# Altium PCB AudioDSP-2.0.PcbDoc (part 1 of 2)
Units mil, origin at the board's own origin, x right, y up, seen from the top; angles counter-clockwise.
Board outline 3935 x 3935 mil, 4 copper layers (Top Layer, MLT, MLB, Bottom Layer), stack 59.617 mil thick; 223 components, 140 nets, 777 pads, 366 vias.
Unrouted connection lines stored in the file: 450.
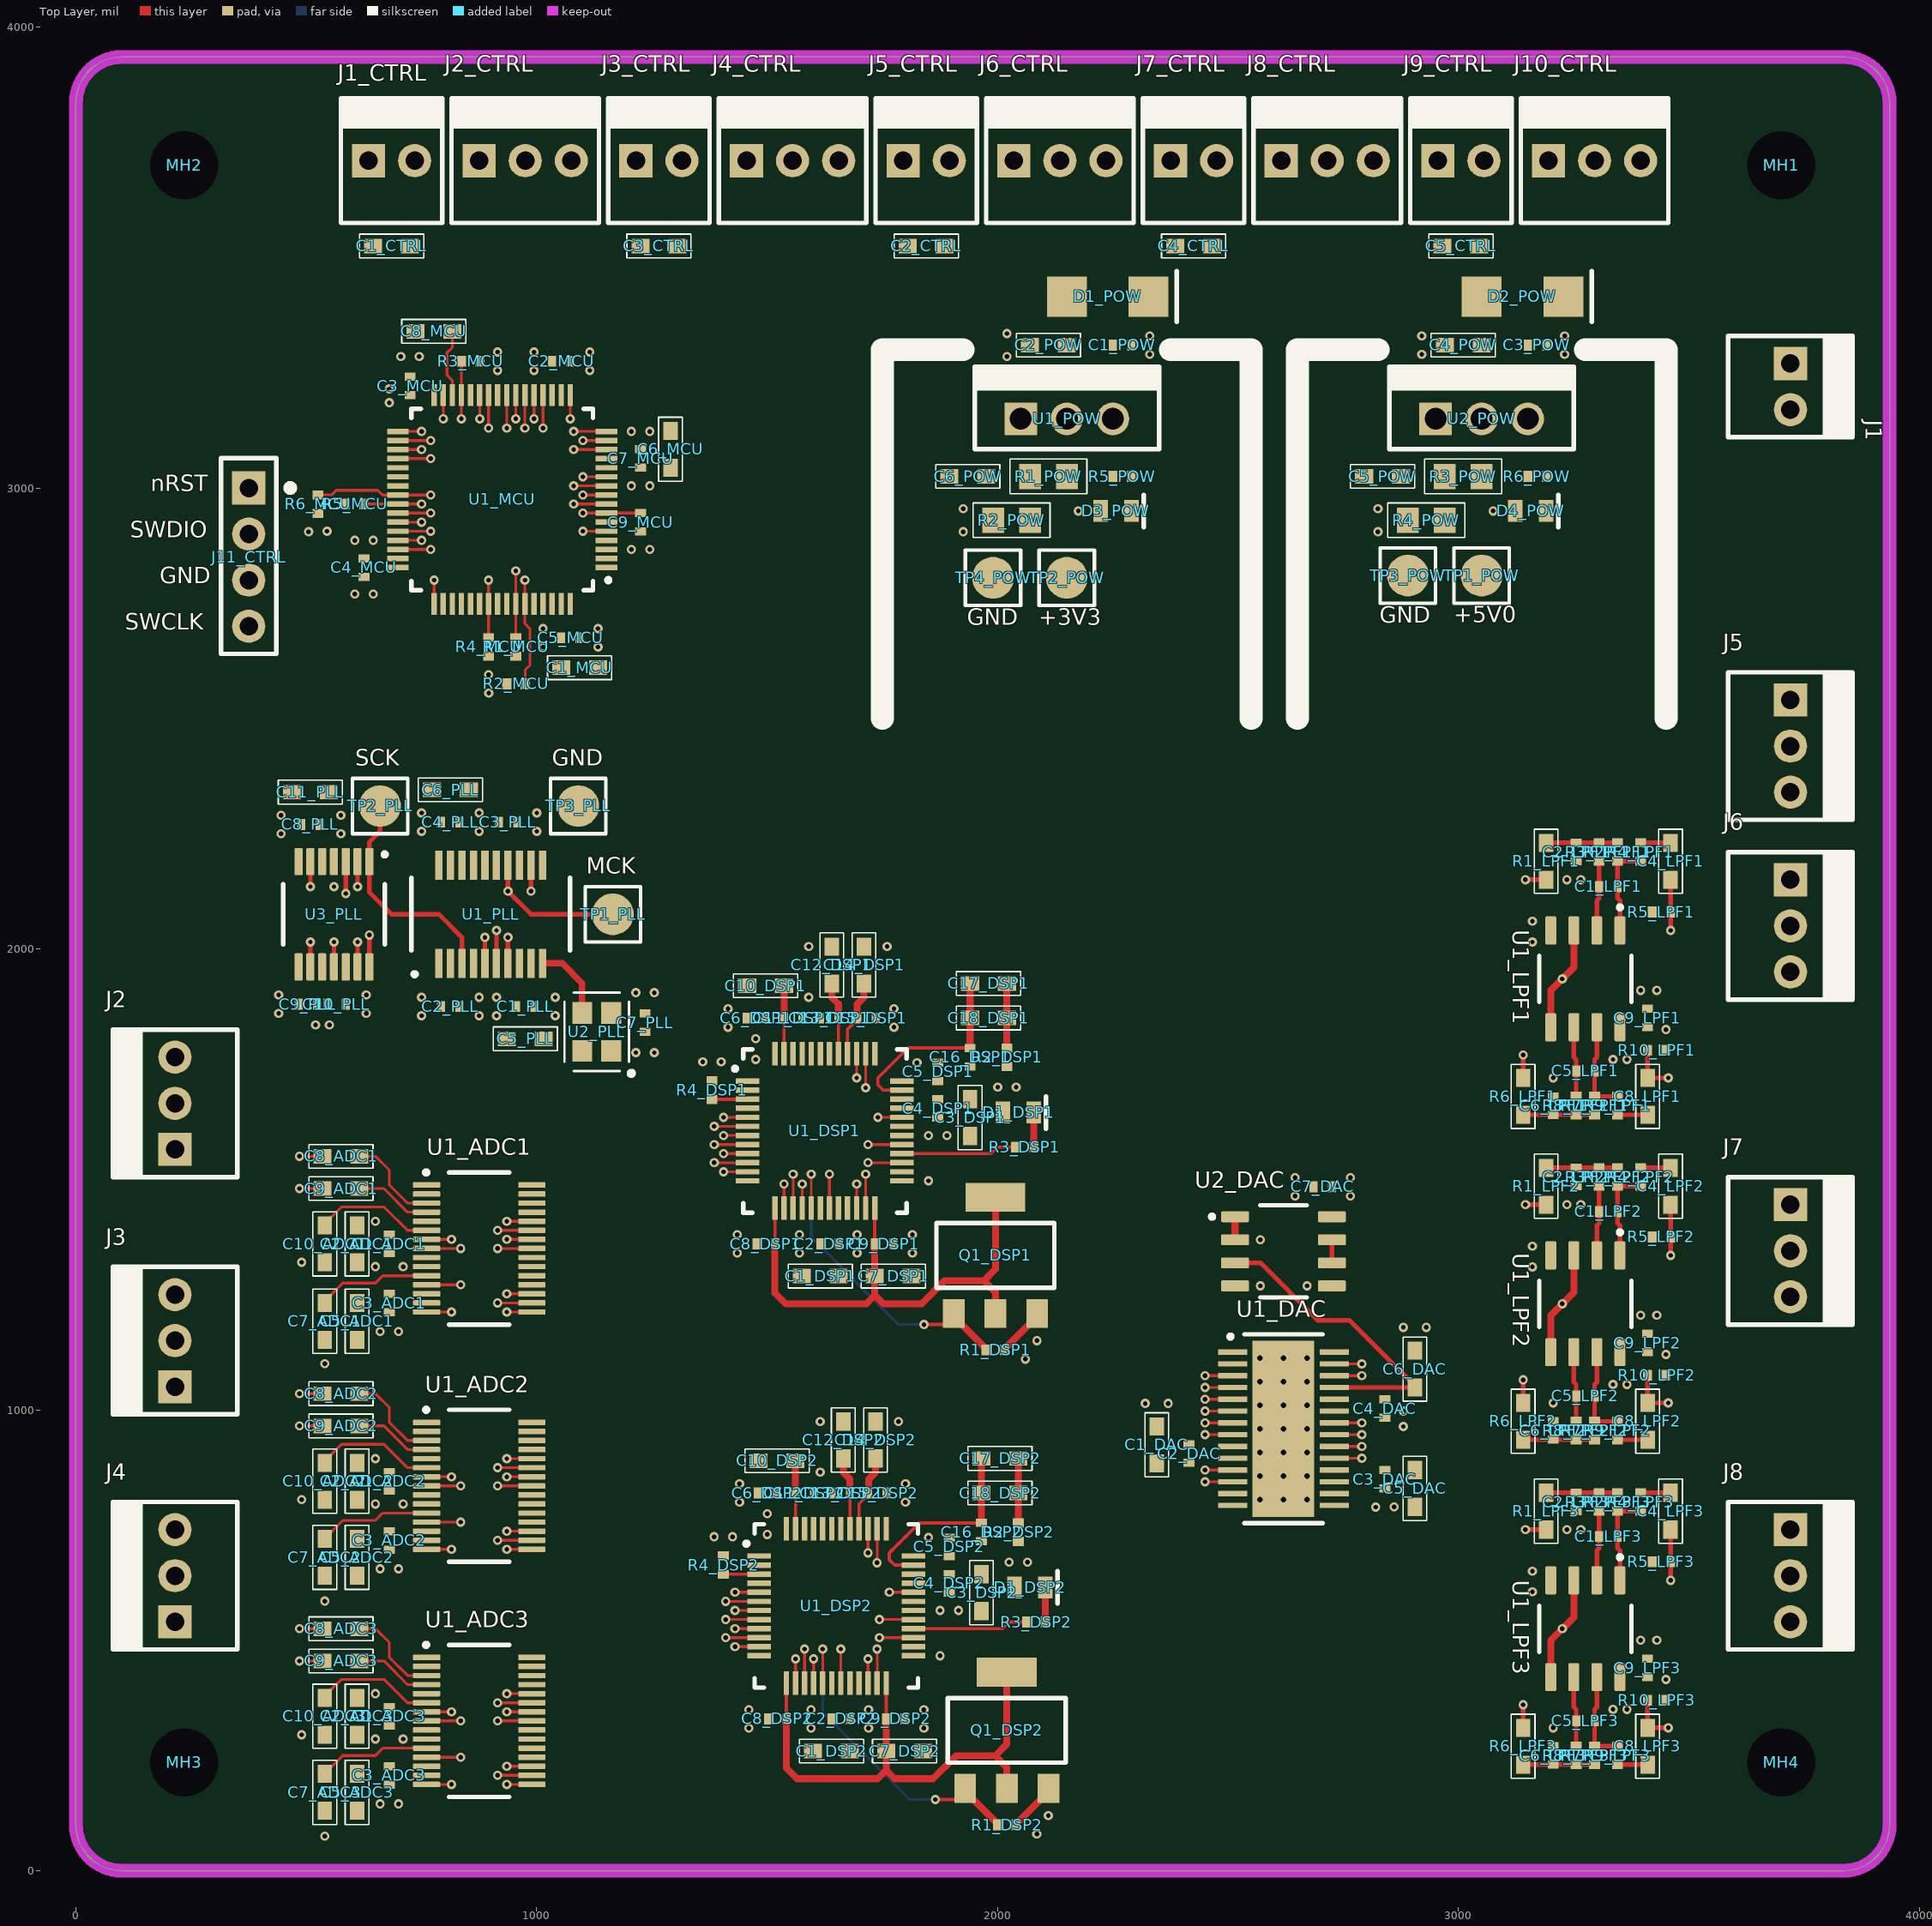
[diagram p0: Top Layer view]
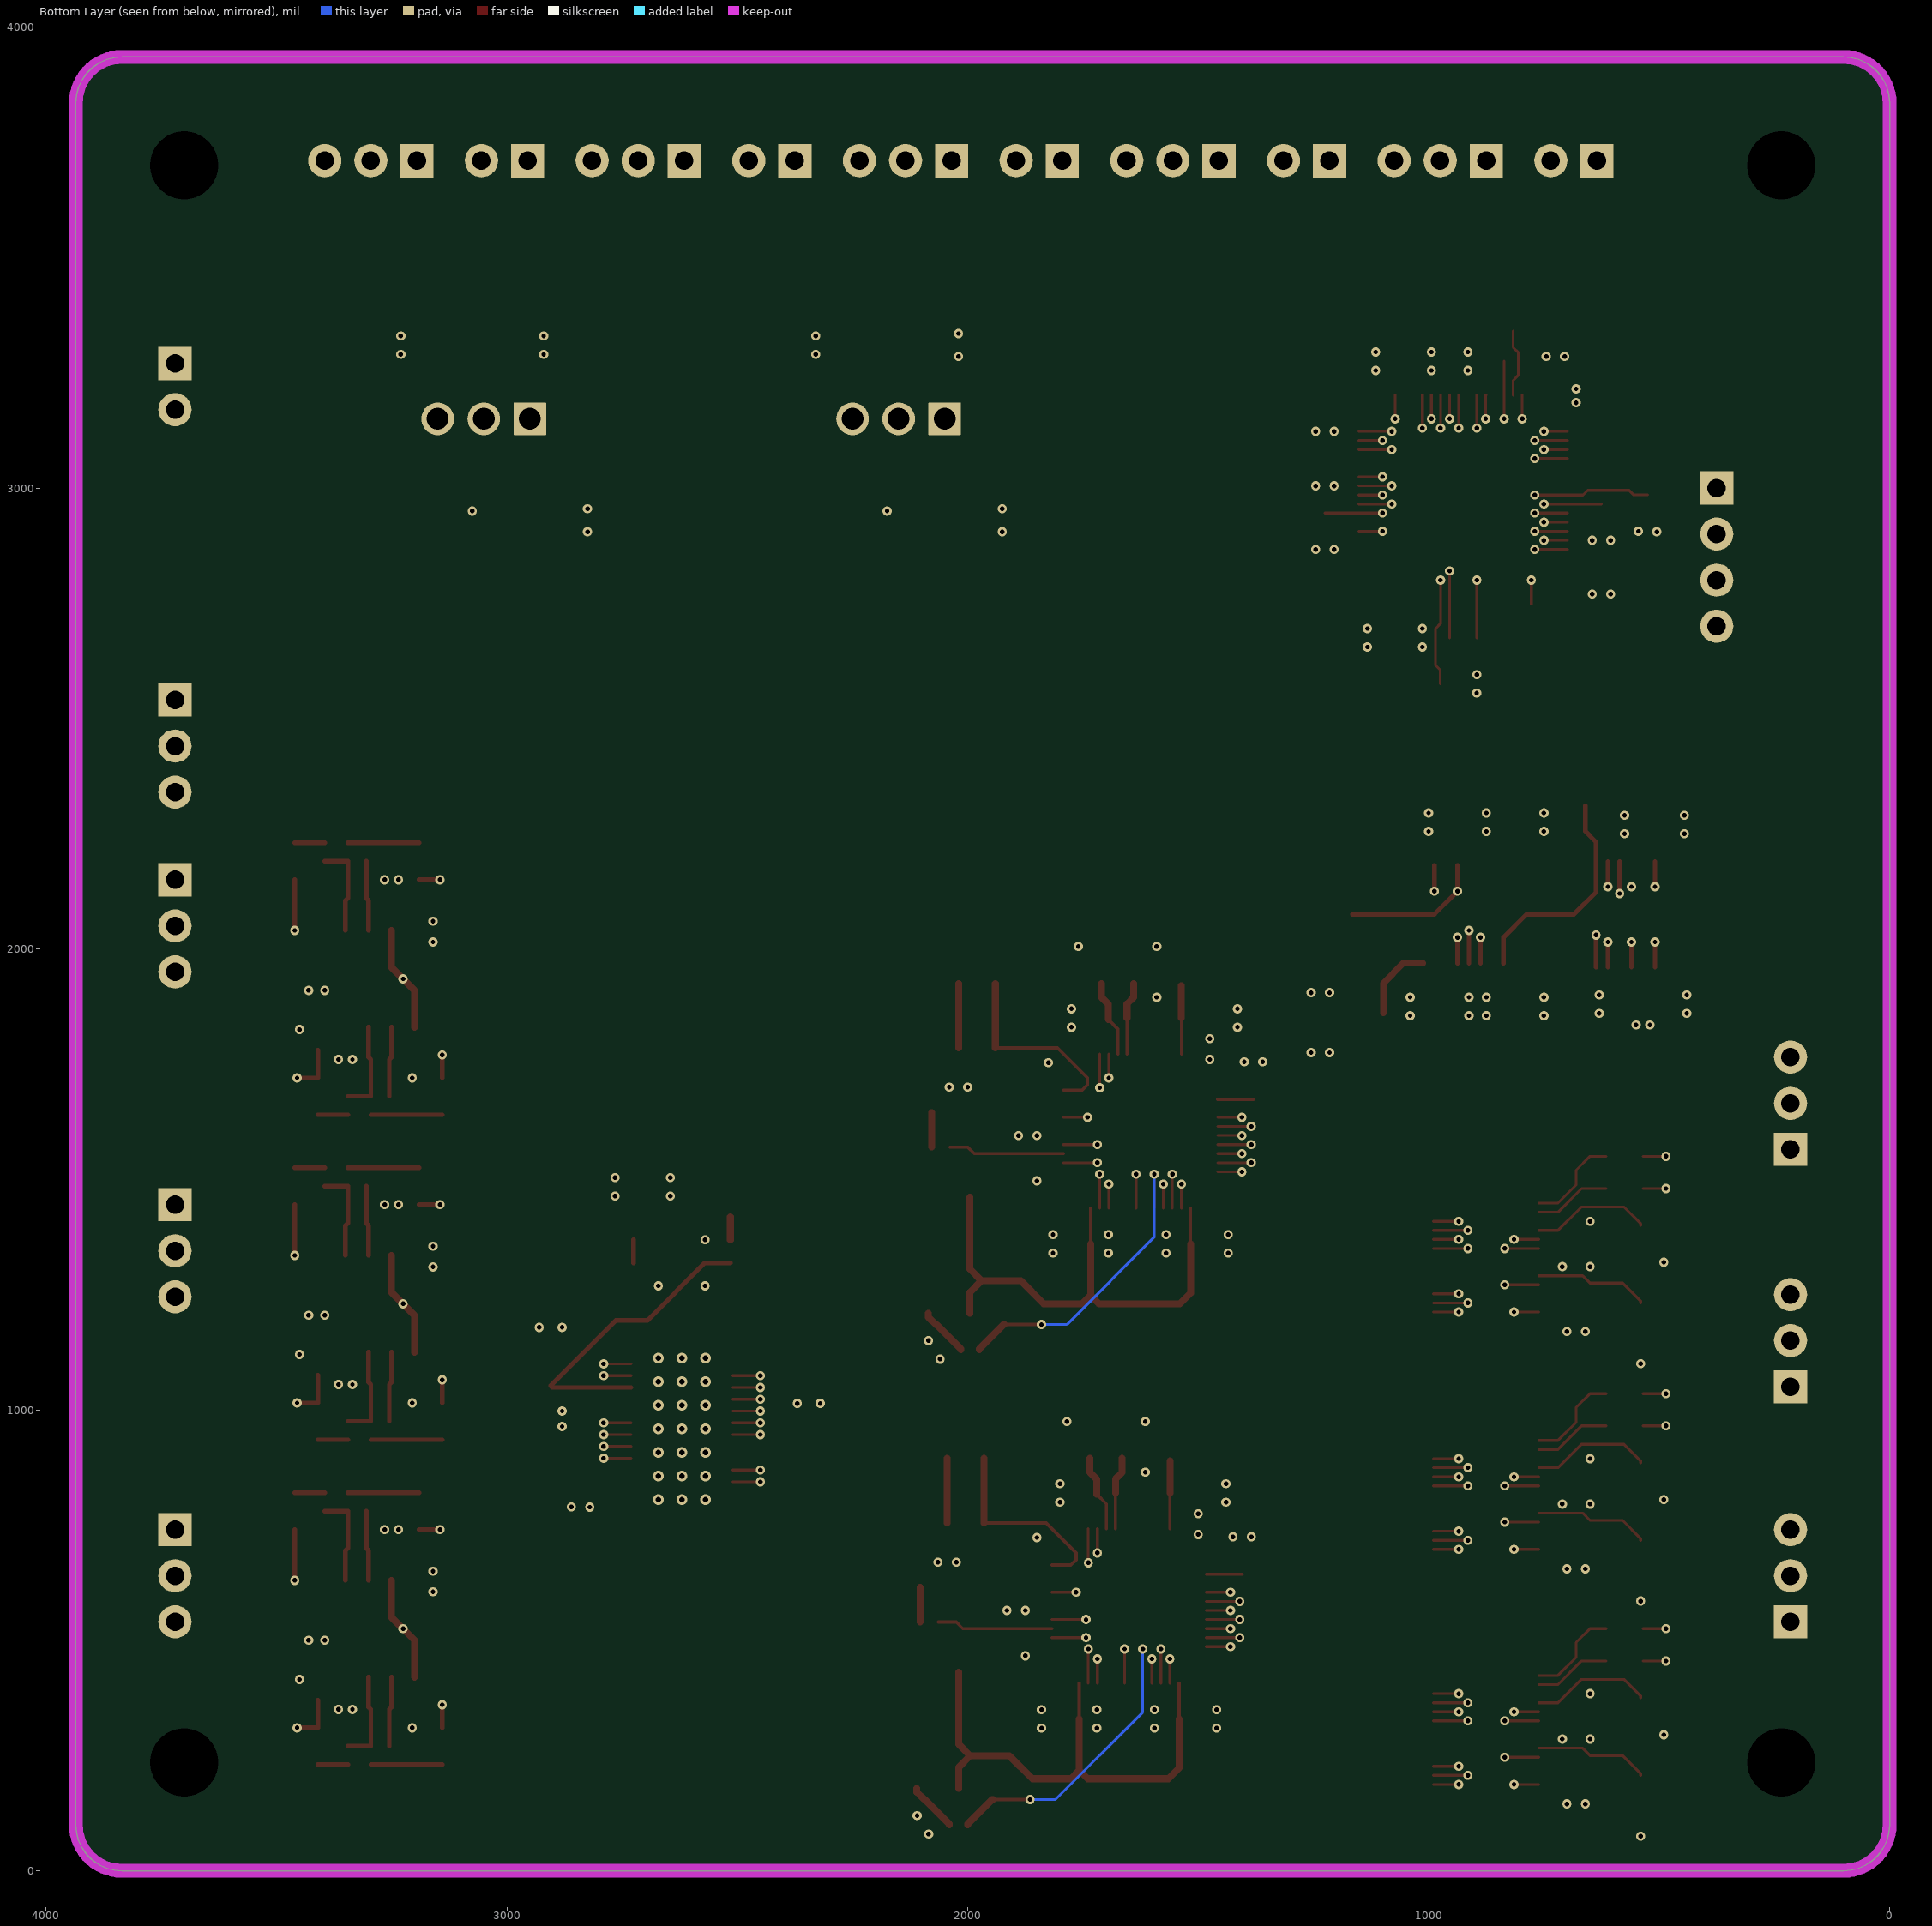
[diagram p1: Bottom Layer view, seen from below]
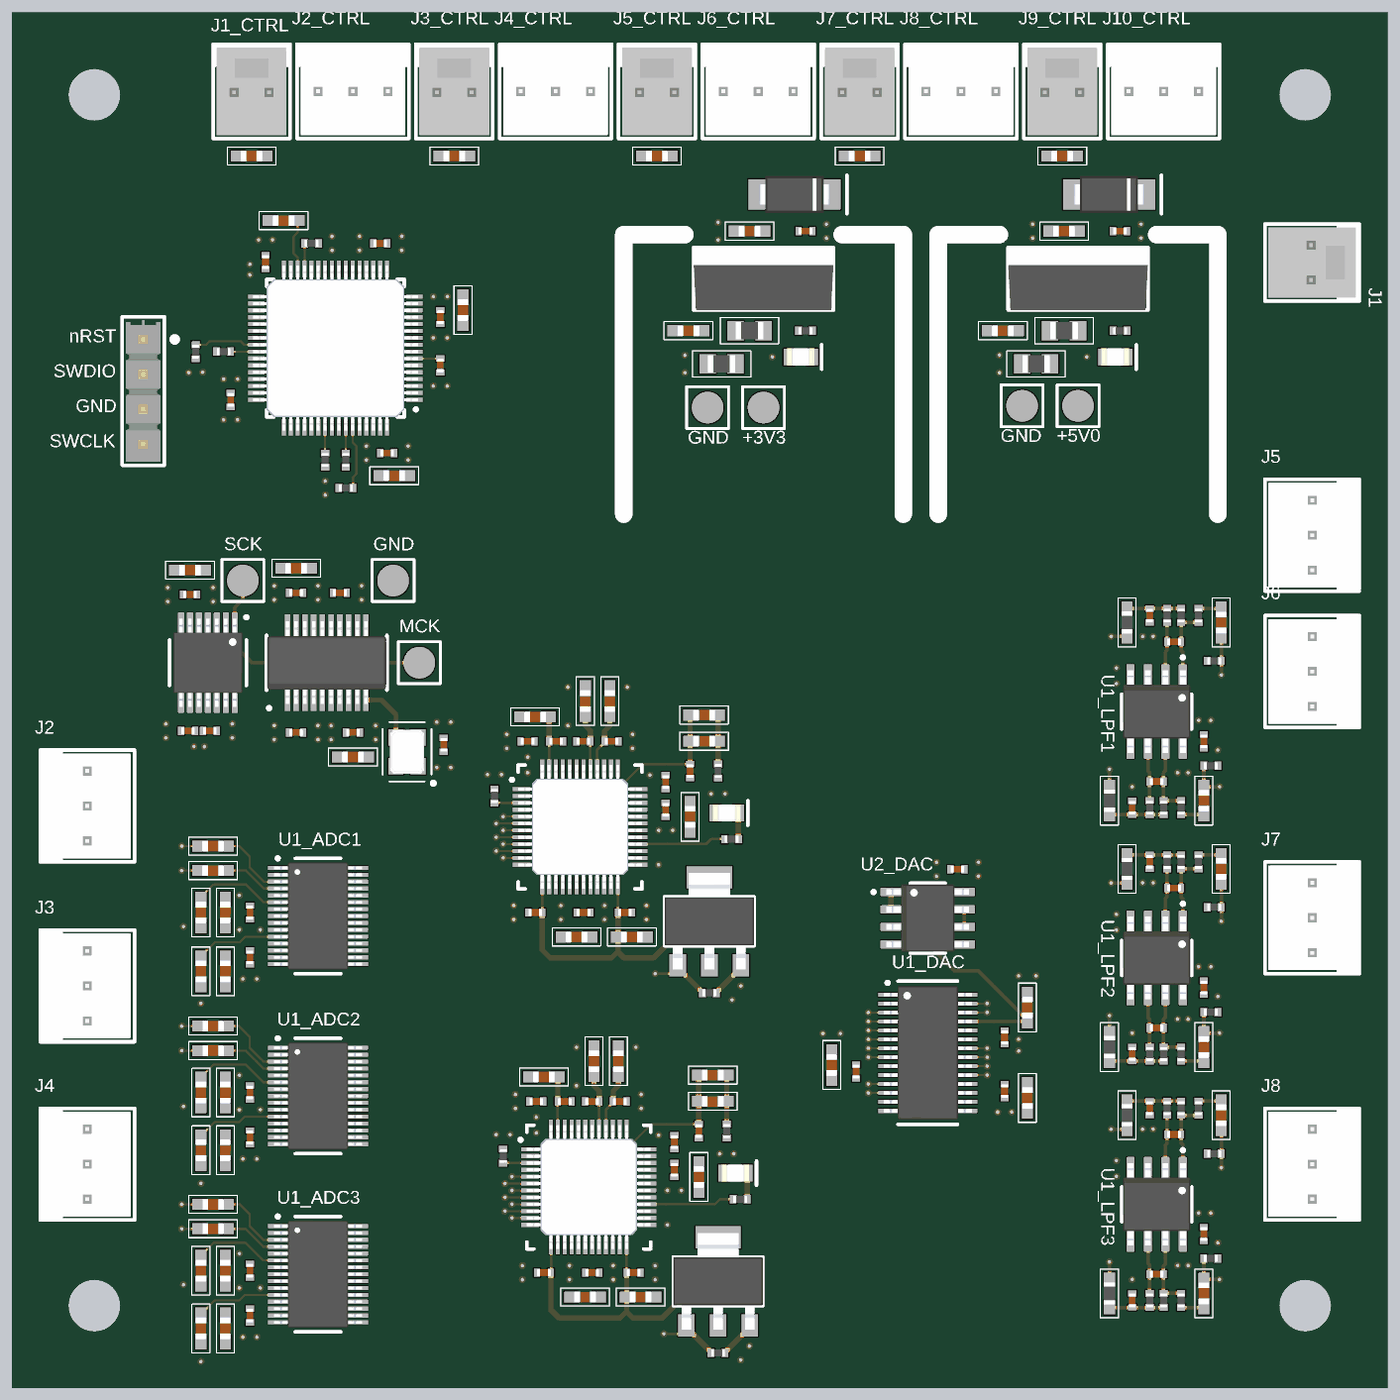
[diagram p3: 3D render of the assembled board from above, using the file's embedded part models]

## Layer stack, top to bottom
Top Solder: solder mask 0.8, Solder Resist, Dk 3.5
Top Layer: signal copper 1.4
Dielectric 2: prepreg 8.2, PP-022, Dk 4.5
MLT: signal copper 0.7087
Dielectric 1: core 39, Core-042, Dk 4.6
MLB: signal copper 0.7087
Dielectric 3: prepreg 8.2, PP-022, Dk 4.5
Bottom Layer: signal copper 1.4
Bottom Solder: solder mask 0.8, Solder Resist, Dk 3.5

## Board outline
100,0 cw(c100,100) 0,100 0,3835 cw(c100,3835) 100,3935 3835,3935 cw(c3835,3835) 3935,3835 3935,100 cw(c3835,100) 3835,0

## Design rules (kind name [scope] priority, off if disabled: settings)
Clearance [All] p1: gap=10 ignorepadtopadclearanceinfootprint=FALSE except(0: Arc-Hole Track-Hole SMDPad-Hole THPad-Hole Via-Hole Fill-Hole Poly-Hole Region-Hole Text-Hole; 5: Arc-Arc Arc-Track Arc-Via Track-Track Track-Via SMDPad-SMDPad SMDPad-Via THPad-Via Via-Via)
ComponentClearance MountHoles [InComponentClass('MountHole')] p1: gap=-1 collisioncheckmode=3 verticalgap=-1 showdistances=FALSE
ComponentClearance [All] p2: gap=10 collisioncheckmode=3 verticalgap=10 showdistances=FALSE
MinimumAnnularRing [All] p1: minimumring=5.12
MinimumSolderMaskSliver [All] p1: minsoldermaskwidth=3.94
PolygonConnect [All] p1: connectstyle=Relief reliefconductorwidth=10 reliefentries=4 polygonreliefangle="90 Angle" airgapwidth=10
RoutingVias [All] p1: holewidth=11.81 width=23.62 viastyle="Through Hole" minholewidth=11.81 minwidth=23.62 maxholewidth=28 maxwidth=50
SilkToSilkClearance [All] p1: silktosilkclearance=5.91
SolderMaskExpansion [All] p1: expansion=4 istentingtop=FALSE
Width [All] p1: maxlimit=20 minlimit=5 preferedwidth=10
27 further rules are at their usual default settings.

## Classes and differential pairs
channel class LPF_Block: LPF1 LPF2 LPF3
channel class DSP_Block: DSP1 DSP2
channel class ADC_Block: ADC1 ADC2 ADC3
component class POW: C1_POW C2_POW C3_POW C4_POW C5_POW C6_POW D1_POW D2_POW D3_POW D4_POW R1_POW R2_POW R3_POW R4_POW R5_POW R6_POW TP1_POW TP2_POW TP3_POW TP4_POW U1_POW U2_POW
component class PLL: C1_PLL C2_PLL C3_PLL C4_PLL C5_PLL C6_PLL C7_PLL C8_PLL C9_PLL C10_PLL C11_PLL TP1_PLL TP2_PLL TP3_PLL U1_PLL U2_PLL U3_PLL
component class OUT_CONN: J5 J6 J7 J8
component class MountHole: MH1 MH2 MH3 MH4
component class MCU: C1_MCU C2_MCU C3_MCU C4_MCU C5_MCU C6_MCU C7_MCU C8_MCU C9_MCU R1_MCU R2_MCU R3_MCU R4_MCU R5_MCU R6_MCU U1_MCU
component class LPF3: C1_LPF3 C2_LPF3 C4_LPF3 C5_LPF3 C6_LPF3 C8_LPF3 C9_LPF3 R1_LPF3 R2_LPF3 R3_LPF3 R4_LPF3 R5_LPF3 R6_LPF3 R7_LPF3 R8_LPF3 R9_LPF3 R10_LPF3 U1_LPF3
component class LPF2: C1_LPF2 C2_LPF2 C4_LPF2 C5_LPF2 C6_LPF2 C8_LPF2 C9_LPF2 R1_LPF2 R2_LPF2 R3_LPF2 R4_LPF2 R5_LPF2 R6_LPF2 R7_LPF2 R8_LPF2 R9_LPF2 R10_LPF2 U1_LPF2
component class LPF1: C1_LPF1 C2_LPF1 C4_LPF1 C5_LPF1 C6_LPF1 C8_LPF1 C9_LPF1 R1_LPF1 R2_LPF1 R3_LPF1 R4_LPF1 R5_LPF1 R6_LPF1 R7_LPF1 R8_LPF1 R9_LPF1 R10_LPF1 U1_LPF1
component class IN_CONN: J1 J2 J3 J4
component class DSP2: C1_DSP2 C2_DSP2 C3_DSP2 C4_DSP2 C5_DSP2 C6_DSP2 C7_DSP2 C8_DSP2 C9_DSP2 C10_DSP2 C11_DSP2 C12_DSP2 C13_DSP2 C14_DSP2 C15_DSP2 C16_DSP2 C17_DSP2 C18_DSP2 D1_DSP2 Q1_DSP2 R1_DSP2 R2_DSP2 R3_DSP2 R4_DSP2 U1_DSP2
component class DSP1: C1_DSP1 C2_DSP1 C3_DSP1 C4_DSP1 C5_DSP1 C6_DSP1 C7_DSP1 C8_DSP1 C9_DSP1 C10_DSP1 C11_DSP1 C12_DSP1 C13_DSP1 C14_DSP1 C15_DSP1 C16_DSP1 C17_DSP1 C18_DSP1 D1_DSP1 Q1_DSP1 R1_DSP1 R2_DSP1 R3_DSP1 R4_DSP1 U1_DSP1
component class DAC: C1_DAC C2_DAC C3_DAC C4_DAC C5_DAC C6_DAC C7_DAC U1_DAC U2_DAC
component class CTRL: C1_CTRL C2_CTRL C3_CTRL C4_CTRL C5_CTRL J1_CTRL J2_CTRL J3_CTRL J4_CTRL J5_CTRL J6_CTRL J7_CTRL J8_CTRL J9_CTRL J10_CTRL J11_CTRL
component class AudioDSP-v2.0_top: MH1 MH2 MH3 MH4
component class ADC3: C1_ADC3 C2_ADC3 C3_ADC3 C5_ADC3 C7_ADC3 C8_ADC3 C9_ADC3 C10_ADC3 U1_ADC3
component class ADC2: C1_ADC2 C2_ADC2 C3_ADC2 C5_ADC2 C7_ADC2 C8_ADC2 C9_ADC2 C10_ADC2 U1_ADC2
component class ADC1: C1_ADC1 C2_ADC1 C3_ADC1 C5_ADC1 C7_ADC1 C8_ADC1 C9_ADC1 C10_ADC1 U1_ADC1

## Components (designator, comment, footprint, x,y, rotation, side; value= is the part's Value field where it differs from the comment)
C1_ADC1 "0.1uF" 0402-CAP-TDK 680,1360 r270 top (schematic designator C1)
C1_ADC2 "0.1uF" 0402-CAP-TDK 680,845 r270 top (schematic designator C1)
C1_ADC3 "0.1uF" 0402-CAP-TDK 680,335 r270 top (schematic designator C1)
C1_CTRL "1uF" 0603-CAP-TDK 685,3525 r180 top (schematic designator C1)
C1_DAC "10uF" 0603-CAP-TDK 2345,923.82 r90 top (schematic designator C1)
C1_DSP1 "10uF" 0603-CAP-TDK 1615,1290 r0 top (schematic designator C1)
C1_DSP2 "10uF" 0603-CAP-TDK 1639.37,259.53 r0 top (schematic designator C1)
C1_LPF1 "470pF" 0402-CAP-TDK 3325,2135 r0 top (schematic designator C1)
C1_LPF2 "470pF" 0402-CAP-TDK 3325,1430 r0 top (schematic designator C1)
C1_LPF3 "470pF" 0402-CAP-TDK 3325,725 r0 top (schematic designator C1)
C1_MCU "10uF" 0603-CAP-TDK 1092.95,2610 r0 top (schematic designator C1)
C1_PLL "0.1uF" 0402-CAP-TDK 975,1875 r180 top (schematic designator C1)
C1_POW "0.1uF" 0402-CAP-TDK 2270,3310 r180 top (schematic designator C1)
C2_ADC1 "10uF" 0603-CAP-TDK 610,1360 r270 top (schematic designator C2)
C2_ADC2 "10uF" 0603-CAP-TDK 610,845 r270 top (schematic designator C2)
C2_ADC3 "10uF" 0603-CAP-TDK 610,335 r270 top (schematic designator C2)
C2_CTRL "1uF" 0603-CAP-TDK 1845,3525 r180 top (schematic designator C2)
C2_DAC "0.1uF" 0402-CAP-TDK 2415,904.84 r90 top (schematic designator C2)
C2_DSP1 "0.1uF" 0402-CAP-TDK 1635,1360 r0 top (schematic designator C2)
C2_DSP2 "0.1uF" 0402-CAP-TDK 1659.68,329.53 r0 top (schematic designator C2)
C2_LPF1 "4700pF" 0402-CAP-TDK 3255,2210 r90 top (schematic designator C2)
C2_LPF2 "4700pF" 0402-CAP-TDK 3255,1505 r90 top (schematic designator C2)
C2_LPF3 "4700pF" 0402-CAP-TDK 3255,800 r90 top (schematic designator C2)
C2_MCU "0.1uF" 0402-CAP-TDK 1053.27,3275 r180 top (schematic designator C2)
C2_PLL "0.1uF" 0402-CAP-TDK 812.5,1875 r180 top (schematic designator C2)
C2_POW "10uF" 0603-CAP-TDK 2110,3310 r0 top (schematic designator C2)
C3_ADC1 "0.1uF" 0402-CAP-TDK 680,1231.57 r270 top (schematic designator C3)
C3_ADC2 "0.1uF" 0402-CAP-TDK 680,716.57 r270 top (schematic designator C3)
C3_ADC3 "0.1uF" 0402-CAP-TDK 680,206.57 r270 top (schematic designator C3)
C3_CTRL "1uF" 0603-CAP-TDK 1265,3525 r180 top (schematic designator C3)
C3_DAC "0.1uF" 0402-CAP-TDK 2840,849.25 r270 top (schematic designator C3)
C3_DSP1 "10uF" 0603-CAP-TDK 1940,1633.9 r270 top (schematic designator C3)
C3_DSP2 "10uF" 0603-CAP-TDK 1964.84,603.43 r270 top (schematic designator C3)
C3_MCU "0.1uF" 0402-CAP-TDK 725,3221.38 r270 top (schematic designator C3)
C3_PLL "0.1uF" 0402-CAP-TDK 937.5,2275 r0 top (schematic designator C3)
C3_POW "0.1uF" 0402-CAP-TDK 3170,3310 r180 top (schematic designator C3)
C4_CTRL "1uF" 0603-CAP-TDK 2425,3525 r180 top (schematic designator C4)
C4_DAC "0.1uF" 0402-CAP-TDK 2840,1002.8 r270 top (schematic designator C4)
C4_DSP1 "0.1uF" 0402-CAP-TDK 1870,1653.9 r270 top (schematic designator C4)
C4_DSP2 "0.1uF" 0402-CAP-TDK 1894.84,623.43 r270 top (schematic designator C4)
C4_LPF1 "10uF" 0603-CAP-TDK 3460,2190 r90 top (schematic designator C4)
C4_LPF2 "10uF" 0603-CAP-TDK 3460,1485 r90 top (schematic designator C4)
C4_LPF3 "10uF" 0603-CAP-TDK 3460,780 r90 top (schematic designator C4)
C4_MCU "0.1uF" 0402-CAP-TDK 625,2827.05 r270 top (schematic designator C4)
C4_PLL "0.1uF" 0402-CAP-TDK 812.5,2275 r180 top (schematic designator C4)
C4_POW "10uF" 0603-CAP-TDK 3010,3310 r0 top (schematic designator C4)
C5_ADC1 "10uF" 0603-CAP-TDK 610,1191.89 r270 top (schematic designator C5)
C5_ADC2 "10uF" 0603-CAP-TDK 610,680 r270 top (schematic designator C5)
C5_ADC3 "10uF" 0603-CAP-TDK 610,170 r270 top (schematic designator C5)
C5_CTRL "1uF" 0603-CAP-TDK 3005,3525 r180 top (schematic designator C5)
C5_DAC "10uF" 0603-CAP-TDK 2905,829.25 r270 top (schematic designator C5)
C5_DSP1 "0.1uF" 0402-CAP-TDK 1870,1733.27 r90 top (schematic designator C5)
C5_DSP2 "0.1uF" 0402-CAP-TDK 1894.84,702.8 r90 top (schematic designator C5)
C5_LPF1 "470pF" 0402-CAP-TDK 3275,1735 r0 top (schematic designator C5)
C5_LPF2 "470pF" 0402-CAP-TDK 3275,1030 r0 top (schematic designator C5)
C5_LPF3 "470pF" 0402-CAP-TDK 3275,325 r0 top (schematic designator C5)
C5_MCU "0.1uF" 0402-CAP-TDK 1072.95,2675 r0 top (schematic designator C5)
C5_PLL "10uF" 0603-CAP-TDK 975,1805 r180 top (schematic designator C5)
C5_POW "10uF" 0603-CAP-TDK 2835,3025 r0 top (schematic designator C5)
C6_DAC "10uF" 0603-CAP-TDK 2905,1088.39 r270 top (schematic designator C6)
C6_DSP1 "0.1uF" 0402-CAP-TDK 1475,1850 r180 top (schematic designator C6)
C6_DSP2 "0.1uF" 0402-CAP-TDK 1499.84,819.53 r180 top (schematic designator C6)
C6_LPF1 "4700pF" 0402-CAP-TDK 3205,1660 r270 top (schematic designator C6)
C6_LPF2 "4700pF" 0402-CAP-TDK 3205,955 r270 top (schematic designator C6)
C6_LPF3 "4700pF" 0402-CAP-TDK 3205,250 r270 top (schematic designator C6)
C6_MCU "1uF" 0603-CAP-TDK 1290,3083.9 r90 top (schematic designator C6)
C6_PLL "10uF" 0603-CAP-TDK 812.5,2345 r180 top (schematic designator C6)
C6_POW "10uF" 0603-CAP-TDK 1935,3025 r0 top (schematic designator C6)
C7_ADC1 "10uF" 0603-CAP-TDK 540,1191.89 r270 top (schematic designator C7)
C7_ADC2 "10uF" 0603-CAP-TDK 540,680 r270 top (schematic designator C7)
C7_ADC3 "10uF" 0603-CAP-TDK 540,170 r270 top (schematic designator C7)
C7_DAC "0.1uF" 0402-CAP-TDK 2705,1483.82 r180 top (schematic designator C7)
C7_DSP1 "10uF" 0603-CAP-TDK 1773.27,1290 r180 top (schematic designator C7)
C7_DSP2 "10uF" 0603-CAP-TDK 1798.11,259.53 r180 top (schematic designator C7)
C7_MCU "0.1uF" 0402-CAP-TDK 1225,3063.9 r90 top (schematic designator C7)
C7_PLL "0.1uF" 0402-CAP-TDK 1235,1840 r270 top (schematic designator C7)
C8_ADC1 "10uF" 0603-CAP-TDK 575,1550 r180 top (schematic designator C8)
C8_ADC2 "10uF" 0603-CAP-TDK 575,1035 r180 top (schematic designator C8)
C8_ADC3 "10uF" 0603-CAP-TDK 575,525 r180 top (schematic designator C8)
C8_DSP1 "0.1uF" 0402-CAP-TDK 1496.73,1360 r0 top (schematic designator C8)
C8_DSP2 "0.1uF" 0402-CAP-TDK 1521.57,329.53 r0 top (schematic designator C8)
C8_LPF1 "10uF" 0603-CAP-TDK 3410,1680 r270 top (schematic designator C8)
C8_LPF2 "10uF" 0603-CAP-TDK 3410,975 r270 top (schematic designator C8)
C8_LPF3 "10uF" 0603-CAP-TDK 3410,270 r270 top (schematic designator C8)
C8_MCU "10uF" 0603-CAP-TDK 776.73,3340 r0 top (schematic designator C8)
C8_PLL "0.1uF" 0402-CAP-TDK 508.82,2270 r0 top (schematic designator C8)
C9_ADC1 "10uF" 0603-CAP-TDK 575,1480 r180 top (schematic designator C9)
C9_ADC2 "10uF" 0603-CAP-TDK 575,965 r180 top (schematic designator C9)
C9_ADC3 "10uF" 0603-CAP-TDK 575,455 r180 top (schematic designator C9)
C9_DSP1 "0.1uF" 0402-CAP-TDK 1753.27,1360 r180 top (schematic designator C9)
C9_DSP2 "0.1uF" 0402-CAP-TDK 1778.11,329.53 r180 top (schematic designator C9)
C9_LPF1 "0.1uF" 0402-CAP-TDK 3410,1850 r90 top (schematic designator C9)
C9_LPF2 "0.1uF" 0402-CAP-TDK 3410,1145 r90 top (schematic designator C9)
C9_LPF3 "0.1uF" 0402-CAP-TDK 3410,440 r90 top (schematic designator C9)
C9_MCU "0.1uF" 0402-CAP-TDK 1225,2925.47 r90 top (schematic designator C9)
C9_PLL "0.1uF" 0402-CAP-TDK 503.23,1880 r180 top (schematic designator C9)
C10_ADC1 "10uF" 0603-CAP-TDK 540,1360 r90 top (schematic designator C10)
C10_ADC2 "10uF" 0603-CAP-TDK 540,845 r90 top (schematic designator C10)
C10_ADC3 "10uF" 0603-CAP-TDK 540,335 r90 top (schematic designator C10)
C10_DSP1 "10uF" 0603-CAP-TDK 1496.42,1920 r180 top (schematic designator C10)
C10_DSP2 "10uF" 0603-CAP-TDK 1521.26,889.53 r180 top (schematic designator C10)
C10_PLL "0.1uF" 0402-CAP-TDK 565.59,1880 r0 top (schematic designator C10)
C11_DSP1 "0.1uF" 0402-CAP-TDK 1556.42,1850 r0 top (schematic designator C11)
C11_DSP2 "0.1uF" 0402-CAP-TDK 1581.26,819.53 r0 top (schematic designator C11)
C11_PLL "10uF" 0603-CAP-TDK 508.82,2340 r0 top (schematic designator C11)
C12_DSP1 "10uF" 0603-CAP-TDK 1640,1965 r270 top (schematic designator C12)
C12_DSP2 "10uF" 0603-CAP-TDK 1664.84,934.53 r270 top (schematic designator C12)
C13_DSP1 "0.1uF" 0402-CAP-TDK 1634.53,1850 r0 top (schematic designator C13)
C13_DSP2 "0.1uF" 0402-CAP-TDK 1659.37,819.53 r0 top (schematic designator C13)
C14_DSP1 "10uF" 0603-CAP-TDK 1710,1965 r270 top (schematic designator C14)
C14_DSP2 "10uF" 0603-CAP-TDK 1734.84,934.53 r270 top (schematic designator C14)
C15_DSP1 "0.1uF" 0402-CAP-TDK 1715,1850 r180 top (schematic designator C15)
C15_DSP2 "0.1uF" 0402-CAP-TDK 1738.74,819.53 r180 top (schematic designator C15)
C16_DSP1 "3.3nF" 0402-CAP-TDK 1940,1765 r90 top (schematic designator C16)
C16_DSP2 "3.3nF" 0402-CAP-TDK 1964.84,734.53 r90 top (schematic designator C16)
C17_DSP1 "33nF" 0603-CAP-TDK 1980,1925 r180 top (schematic designator C17)
C17_DSP2 "33nF" 0603-CAP-TDK 2004.84,894.53 r180 top (schematic designator C17)
C18_DSP1 "22nF" 0603-CAP-TDK 1980,1850 r180 top (schematic designator C18)
C18_DSP2 "22nF" 0603-CAP-TDK 2004.84,819.53 r180 top (schematic designator C18)
D1_DSP1 "LED" LED-0805 2045,1645 r180 top (schematic designator D1)
D1_DSP2 "LED" LED-0805 2069.84,614.53 r180 top (schematic designator D1)
D1_POW "1N4007" DO-214AC-SMA 2238.58,3415 r0 top (schematic designator D1)
D2_POW "1N4007" DO-214AC-SMA 3138.58,3415 r0 top (schematic designator D2)
D3_POW "LED" LED-0805 2256.54,2950 r180 top (schematic designator D3)
D4_POW "LED" LED-0805 3156.54,2950 r180 top (schematic designator D4)
J1 "POW" MOLEX-2 3720,3270 r270 top locked
J1_CTRL "DC" MOLEX-2 635,3710 r0 top locked (schematic designator J1)
J2 "F-IN" MOLEX-3 215,1565 r90 top locked
J2_CTRL "AN-POT" MOLEX-3 875,3710 r0 top locked (schematic designator J2)
J3 "S-IN" MOLEX-3 215,1050 r90 top locked
J3_CTRL "DC" MOLEX-2 1215,3710 r0 top locked (schematic designator J3)
J4 "C-IN" MOLEX-3 215,540 r90 top locked
J4_CTRL "AN-POT" MOLEX-3 1455,3710 r0 top locked (schematic designator J4)
J5 "F-OUT-AUX" MOLEX-3 3720,2540 r270 top locked
J5_CTRL "DC" MOLEX-2 1795,3710 r0 top locked (schematic designator J5)
J6 "F-OUT" MOLEX-3 3720,2150 r270 top locked
J6_CTRL "AN-POT" MOLEX-3 2035,3710 r0 top locked (schematic designator J6)
J7 "S-OUT" MOLEX-3 3720,1445 r270 top locked
J7_CTRL "DC" MOLEX-2 2375,3710 r0 top locked (schematic designator J7)
J8 "C-OUT" MOLEX-3 3720,740 r270 top locked
J8_CTRL "AN-POT" MOLEX-3 2615,3710 r0 top locked (schematic designator J8)
J9_CTRL "DC" MOLEX-2 2955,3710 r0 top locked (schematic designator J9)
J10_CTRL "AN-POT" MOLEX-3 3195,3710 r0 top locked (schematic designator J10)
J11_CTRL "DEBUG" SIP1X4 375,2850 r180 top locked (schematic designator J11)
MH1 "MH-3.75MM" MH-3.75mm-NP 3700,3700 r0 top locked
MH2 "MH-3.75MM" MH-3.75mm-NP 235,3700 r0 top locked
MH3 "MH-3.75MM" MH-3.75mm-NP 235,235 r0 top locked
MH4 "MH-3.75MM" MH-3.75mm-NP 3700,235 r0 top locked
Q1_DSP1 "FZT953" SOT223-DN 1995,1335 r0 top (schematic designator Q1)
Q1_DSP2 "FZT953" SOT223-DN 2019.84,304.53 r0 top (schematic designator Q1)
R1_DSP1 "1K" 0402-RES-PANASONIC 1995,1130 r0 top (schematic designator R1)
R1_DSP2 "1K" 0402-RES-PANASONIC 2019.84,99.53 r0 top (schematic designator R1)
R1_LPF1 "6K2" 0603-RES-PANASONIC 3190,2190 r270 top (schematic designator R1)
R1_LPF2 "6K2" 0603-RES-PANASONIC 3190,1485 r270 top (schematic designator R1)
R1_LPF3 "6K2" 0603-RES-PANASONIC 3190,780 r270 top (schematic designator R1)
R1_MCU "2K2" 0402-RES-PANASONIC 954.53,2655 r270 top (schematic designator R1)
R1_POW "240" 0805-RES-PANASONIC 2110,3025 r0 top (schematic designator R1)
R2_DSP1 "470" 0402-RES-PANASONIC 2020,1765 r90 top (schematic designator R2)
R2_DSP2 "470" 0402-RES-PANASONIC 2044.84,734.53 r90 top (schematic designator R2)
R2_LPF1 "6K8" 0402-RES-PANASONIC 3345,2210 r270 top (schematic designator R2)
R2_LPF2 "6K8" 0402-RES-PANASONIC 3345,1505 r270 top (schematic designator R2)
R2_LPF3 "6K8" 0402-RES-PANASONIC 3345,800 r270 top (schematic designator R2)
R2_MCU "2K2" 0402-RES-PANASONIC 955,2575 r180 top (schematic designator R2)
R2_POW "390" 0805-RES-PANASONIC 2030,2930 r0 top (schematic designator R2)
R3_DSP1 "680" 0402-RES-PANASONIC 2058.46,1570 r0 top (schematic designator R3)
R3_DSP2 "680" 0402-RES-PANASONIC 2083.31,539.53 r0 top (schematic designator R3)
R3_LPF1 "430" 0402-RES-PANASONIC 3305,2210 r90 top (schematic designator R3)
R3_LPF2 "430" 0402-RES-PANASONIC 3305,1505 r90 top (schematic designator R3)
R3_LPF3 "430" 0402-RES-PANASONIC 3305,800 r90 top (schematic designator R3)
R3_MCU "2K2" 0402-RES-PANASONIC 856.42,3275 r0 top (schematic designator R3)
R3_POW "270" 0805-RES-PANASONIC 3010,3025 r0 top (schematic designator R3)
R4_DSP1 "18K" 0402-RES-PANASONIC 1380,1693.58 r270 top (schematic designator R4)
R4_DSP2 "18K" 0402-RES-PANASONIC 1404.84,663.11 r270 top (schematic designator R4)
R4_LPF1 "47" 0402-RES-PANASONIC 3395,2210 r270 top (schematic designator R4)
R4_LPF2 "47" 0402-RES-PANASONIC 3395,1505 r270 top (schematic designator R4)
R4_LPF3 "47" 0402-RES-PANASONIC 3395,800 r270 top (schematic designator R4)
R4_MCU "2K2" 0402-RES-PANASONIC 895.47,2655 r270 top (schematic designator R4)
R4_POW "820" 0805-RES-PANASONIC 2930,2930 r0 top (schematic designator R4)
R5_LPF1 "10K" 0402-RES-PANASONIC 3440,2080 r0 top (schematic designator R5)
R5_LPF2 "10K" 0402-RES-PANASONIC 3440,1375 r0 top (schematic designator R5)
R5_LPF3 "10K" 0402-RES-PANASONIC 3440,670 r0 top (schematic designator R5)
R5_MCU "2K2" 0402-RES-PANASONIC 605,2965.16 r180 top (schematic designator R5)
R5_POW "680" 0402-RES-PANASONIC 2270,3025 r0 top (schematic designator R5)
R6_LPF1 "6K2" 0603-RES-PANASONIC 3140,1680 r90 top (schematic designator R6)
R6_LPF2 "6K2" 0603-RES-PANASONIC 3140,975 r90 top (schematic designator R6)
R6_LPF3 "6K2" 0603-RES-PANASONIC 3140,270 r90 top (schematic designator R6)
R6_MCU "2K2" 0402-RES-PANASONIC 525,2965 r270 top (schematic designator R6)
R6_POW "1K2" 0402-RES-PANASONIC 3170,3025 r0 top (schematic designator R6)
R7_LPF1 "6K8" 0402-RES-PANASONIC 3295,1660 r90 top (schematic designator R7)
R7_LPF2 "6K8" 0402-RES-PANASONIC 3295,955 r90 top (schematic designator R7)
R7_LPF3 "6K8" 0402-RES-PANASONIC 3295,250 r90 top (schematic designator R7)
R8_LPF1 "430" 0402-RES-PANASONIC 3255,1660 r270 top (schematic designator R8)
R8_LPF2 "430" 0402-RES-PANASONIC 3255,955 r270 top (schematic designator R8)
R8_LPF3 "430" 0402-RES-PANASONIC 3255,250 r270 top (schematic designator R8)
R9_LPF1 "47" 0402-RES-PANASONIC 3345,1660 r90 top (schematic designator R9)
R9_LPF2 "47" 0402-RES-PANASONIC 3345,955 r90 top (schematic designator R9)
R9_LPF3 "47" 0402-RES-PANASONIC 3345,250 r90 top (schematic designator R9)
R10_LPF1 "10K" 0402-RES-PANASONIC 3430,1780 r180 top (schematic designator R10)
R10_LPF2 "10K" 0402-RES-PANASONIC 3430,1075 r180 top (schematic designator R10)
R10_LPF3 "10K" 0402-RES-PANASONIC 3430,370 r180 top (schematic designator R10)
TP1_PLL "TP-PAD" "TPTH - PAD TOP" 1165,2075 r180 top (schematic designator TP1)
TP1_POW "TP-PAD" "TPTH - PAD TOP" 3050,2810 r90 top (schematic designator TP1)
TP2_PLL "TP-PAD" "TPTH - PAD TOP" 660,2310 r180 top (schematic designator TP2)
TP2_POW "TP-PAD" "TPTH - PAD TOP" 2150,2805 r90 top (schematic designator TP2)
TP3_PLL "TP-PAD" "TPTH - PAD TOP" 1090,2310 r180 top (schematic designator TP3)
TP3_POW "TP-PAD" "TPTH - PAD TOP" 2890,2810 r90 top (schematic designator TP3)
TP4_POW "TP-PAD" "TPTH - PAD TOP" 1990,2805 r90 top (schematic designator TP4)
U1_ADC1 "PCM1862DBTR" TI-TSSOP-30-DBT0030A 875,1350 r0 top (schematic designator U1)
U1_ADC2 "PCM1862DBTR" TI-TSSOP-30-DBT0030A 875,835 r0 top (schematic designator U1)
U1_ADC3 "PCM1862DBTR" TI-TSSOP-30-DBT0030A 875,325 r0 top (schematic designator U1)
U1_DAC "PCM1681PWPR" PCM1681PWPR 2620,958.82 r0 top (schematic designator U1)
U1_DSP1 "ADAU1701JSTZ" "LQFP-48 - ST-48" 1625,1605 r0 top (schematic designator U1)
U1_DSP2 "ADAU1701JSTZ" "LQFP-48 - ST-48" 1649.84,574.53 r0 top (schematic designator U1)
U1_LPF1 "OPA1688IDR" TI-SOIC-8 3275,1935 r270 top (schematic designator U1)
U1_LPF2 "OPA1688IDR" TI-SOIC-8 3275,1230 r270 top (schematic designator U1)
U1_LPF3 "OPA1688IDR" TI-SOIC-8 3275,525 r270 top (schematic designator U1)
U1_MCU "STM32F401RxT6" LQFP-64 925,2975 r90 top (schematic designator U1)
U1_PLL "PLL1707" "TI-SSOP-20 - DBQ (R-PDSO-G20)" 900,2075 r90 top (schematic designator U1)
U1_POW "LT1086CT" "TO-220 - KCS0003B" 2150,3150 r0 top (schematic designator U1)
U2_DAC "OPA1688IDR" TI-SOIC-8 2620,1343.82 r0 top (schematic designator U2)
U2_PLL "OXETGLJANF-27MHZ" SMD3225 1130,1820 r90 top (schematic designator U2)
U2_POW "LT1086CT" "TO-220 - KCS0003B" 3050,3150 r0 top (schematic designator U2)
U3_PLL "CDCLVC1106PWR" TI-TSSOP-14-PW0014A 560,2075 r270 top (schematic designator U3)

## Footprints (in the part's own frame and the unit in brackets; to place one, negate y for a bottom-side part, rotate by r counter-clockwise, add the part's x,y. Pads: shape width x height; smd on the part's side, far side on the other; paste and mask are expansions set on the pad)
0402-CAP-TDK [mm]
  rect 0.45x0.6 smd: 1(-0.508,0) 2(0.508,0)
  body extent -0.5,-0.25 0.5,0.25, height 0.55
0402-RES-PANASONIC [mm]
  rect 0.5x0.6 smd: 1(-0.508,0) 2(0.508,0)
  body extent -0.5,-0.25 0.5,0.25, height 0.35
0603-CAP-TDK [mm]
  rect 1x0.8 smd: 1(-1.016,0) 2(1.016,0)
  silkscreen extent -1.77,-0.65 1.77,0.65, body extent -0.8,-0.4 0.8,0.4, height 0.9
0603-RES-PANASONIC [mm]
  rect 1x0.8 smd: 1(-1.016,0) 2(1.016,0)
  silkscreen extent -1.77,-0.65 1.77,0.65, body extent -0.8,-0.4 0.8,0.4, height 0.45
0805-RES-PANASONIC [mm]
  rect 1.2x1.4 smd: 1(-1.016,0) 2(1.016,0)
  silkscreen extent -2.12,-0.95 2.12,0.95, body extent -1,-0.63 1,0.63, height 0.6
DO-214AC-SMA [mm]
  rect 2.2x2.2 smd: 1(-2.25,0) 2(2.25,0)
  silkscreen extent 3.81,-1.4 3.81,1.4, body extent -2.55,-1.33 2.55,1.33, height 2.3
LED-0805 [mm]
  rect 0.8x1.2 smd: 1(-0.85,0) 2(0.85,0)
  silkscreen extent -1.52,-0.89 -1.52,0.89, body extent -1,-0.63 1,0.63, height 0.75
"LQFP-48 - ST-48" [mm]
  rect 1.3x0.3 smd mask+0.05: 1(-4.25,2.75) 2(-4.25,2.25) 3(-4.25,1.75) 4(-4.25,1.25) 5(-4.25,0.75) 6(-4.25,0.25) 7(-4.25,-0.25) 8(-4.25,-0.75) 9(-4.25,-1.25) 10(-4.25,-1.75) 11(-4.25,-2.25) 12(-4.25,-2.75) 25(4.25,-2.75) 26(4.25,-2.25) 27(4.25,-1.75) 28(4.25,-1.25) 29(4.25,-0.75) 30(4.25,-0.25) 31(4.25,0.25) 32(4.25,0.75) 33(4.25,1.25) 34(4.25,1.75) 35(4.25,2.25) 36(4.25,2.75)
  rect 0.3x1.3 smd mask+0.05: 13(-2.75,-4.25) 14(-2.25,-4.25) 15(-1.75,-4.25) 16(-1.25,-4.25) 17(-0.75,-4.25) 18(-0.25,-4.25) 19(0.25,-4.25) 20(0.75,-4.25) 21(1.25,-4.25) 22(1.75,-4.25) 23(2.25,-4.25) 24(2.75,-4.25) 37(2.75,4.25) 38(2.25,4.25) 39(1.75,4.25) 40(1.25,4.25) 41(0.75,4.25) 42(0.25,4.25) 43(-0.25,4.25) 44(-0.75,4.25) 45(-1.25,4.25) 46(-1.75,4.25) 47(-2.25,4.25) 48(-2.75,4.25)
  silkscreen extent -5.05,-4.5 4.5,4.5, body extent -4.5,-4.5 4.5,4.5, height 1.63
LQFP-64 [mm]
  rect 0.3x1.2 smd mask+0.05: 1(-3.75,-5.75) 2(-3.25,-5.75) 3(-2.75,-5.75) 4(-2.25,-5.75) 5(-1.75,-5.75) 6(-1.25,-5.75) 7(-0.75,-5.75) 8(-0.25,-5.75) 9(0.25,-5.75) 10(0.75,-5.75) 11(1.25,-5.75) 12(1.75,-5.75) 13(2.25,-5.75) 14(2.75,-5.75) 15(3.25,-5.75) 16(3.75,-5.75) 33(3.75,5.75) 34(3.25,5.75) 35(2.75,5.75) 36(2.25,5.75) 37(1.75,5.75) 38(1.25,5.75) 39(0.75,5.75) 40(0.25,5.75) 41(-0.25,5.75) 42(-0.75,5.75) 43(-1.25,5.75) 44(-1.75,5.75) 45(-2.25,5.75) 46(-2.75,5.75) 47(-3.25,5.75) 48(-3.75,5.75)
  rect 1.2x0.3 smd mask+0.05: 17(5.75,-3.75) 18(5.75,-3.25) 19(5.75,-2.75) 20(5.75,-2.25) 21(5.75,-1.75) 22(5.75,-1.25) 23(5.75,-0.75) 24(5.75,-0.25) 25(5.75,0.25) 26(5.75,0.75) 27(5.75,1.25) 28(5.75,1.75) 29(5.75,2.25) 30(5.75,2.75) 31(5.75,3.25) 32(5.75,3.75) 49(-5.75,3.75) 50(-5.75,3.25) 51(-5.75,2.75) 52(-5.75,2.25) 53(-5.75,1.75) 54(-5.75,1.25) 55(-5.75,0.75) 56(-5.75,0.25) 57(-5.75,-0.25) 58(-5.75,-0.75) 59(-5.75,-1.25) 60(-5.75,-1.75) 61(-5.75,-2.25) 62(-5.75,-2.75) 63(-5.75,-3.25) 64(-5.75,-3.75)
  silkscreen extent -5,-5.94 5,5, body extent -6,-6 6,6, height 1.62
MH-3.75mm-NP [mm]
  round 3 hole 3.75 unplated: 1(0,0)
MOLEX-2 [mil] "Connector 1x2, Pitch 100mil"
  rect 72x72 hole 40: 1(0,0)
  round 72 hole 40: 2(100,0)
  silkscreen extent -60,-135 160,135, body extent -50,-125 150,125, height 423
MOLEX-3 [mil] "Connector 1x3, Pitch 100mil"
  rect 72x72 hole 40: 1(0,0)
  round 72 hole 40: 2(100,0) 3(200,0)
  silkscreen extent -60,-135 260,135, body extent -50,-125 250,125, height 423
PCM1681PWPR [mm] "PWP(R-PDSO-G28)"
  rect 1.6x0.3 smd mask+0.07: 1(-2.8,4.225) 2(-2.8,3.575) 3(-2.8,2.925) 4(-2.8,2.275) 5(-2.8,1.625) 6(-2.8,0.975) 7(-2.8,0.325) 8(-2.8,-0.325) 9(-2.8,-0.975) 10(-2.8,-1.625) 11(-2.8,-2.275) 12(-2.8,-2.925) 13(-2.8,-3.575) 14(-2.8,-4.225) 15(2.8,-4.225) 16(2.8,-3.575) 17(2.8,-2.925) 18(2.8,-2.275) 19(2.8,-1.625) 20(2.8,-0.975) 21(2.8,-0.325) 22(2.8,0.325) 23(2.8,0.975) 24(2.8,1.625) 25(2.8,2.275) 26(2.8,2.925) 27(2.8,3.575) 28(2.8,4.225)
  rect 2.4x6.46 smd paste+0 mask+0.07: 29(0,0)
  rect 3.4x9.7 smd paste-2 mask-2: 29(0,0)
  silkscreen extent -3.02,-5.21 2.16,5.21, body extent -3.2,-4.85 3.2,4.85, height 1.2
SIP1X4 [mil]
  rect 72x72 hole 40: 1(0,-150)
  round 72 hole 40: 2(0,-50) 3(0,50) 4(0,150)
  silkscreen extent -100,-215 60,210, body extent -50,-205 50,200, height 330
SMD3225 [mm]
  rect 1.2x1.1 smd: 1(-1.05,-0.8) 2(1.05,-0.8) 3(1.05,0.8) 4(-1.05,0.8)
  silkscreen extent -2.41,-2.03 2.16,1.78, body extent -1.6,-1.25 1.6,1.25, height 0.55
SOT223-DN [mm]
  rect 1.2x1.6 smd: B(-2.3,-3.2) C(0,-3.2) E(2.3,-3.2)
  rect 3.3x1.6 smd: C-TAB(0,3.2)
  silkscreen extent -3.25,-1.78 3.25,1.78, body extent -3.25,-3.5 3.25,3.5, height 1.65
TI-SOIC-8 [mm]
  rrect25% 1.55x0.6 smd mask+0.07: 1(-2.667,1.905) 2(-2.667,0.635) 3(-2.667,-0.635) 4(-2.667,-1.905) 5(2.667,-1.905) 6(2.667,-0.635) 7(2.667,0.635) 8(2.667,1.905)
  silkscreen extent -4.04,-2.54 1.27,2.54, body extent -3,-2.45 3,2.45, height 1.75
"TI-SSOP-20 - DBQ (R-PDSO-G20)" [mil]
  rect 63x16 smd mask+2: 1(-106.5,112.5) 2(-106.5,87.5) 3(-106.5,62.5) 4(-106.5,37.5) 5(-106.5,12.5) 6(-106.5,-12.5) 7(-106.5,-37.5) 8(-106.5,-62.5) 9(-106.5,-87.48) 10(-106.5,-112.48) 11(106.5,-112.48) 12(106.5,-87.48) 13(106.5,-62.5) 14(106.5,-37.5) 15(106.5,-12.5) 16(106.5,12.5) 17(106.5,37.5) 18(106.5,62.5) 19(106.5,87.5) 20(106.5,112.5)
  silkscreen extent -134,-172 79,172, body extent -118,-170 118,170, height 68
TI-TSSOP-14-PW0014A [mm]
  rrect25% 1.5x0.45 smd mask+0.05: 1(-2.9,1.95) 2(-2.9,1.3) 3(-2.9,0.65) 4(-2.9,0) 5(-2.9,-0.65) 6(-2.9,-1.3) 7(-2.9,-1.95) 8(2.9,-1.95) 9(2.9,-1.3) 10(2.9,-0.65) 11(2.9,0) 12(2.9,0.65) 13(2.9,1.3) 14(2.9,1.95)
  silkscreen extent -3.4,-2.79 1.65,2.9, body extent -3.2,-2.5 3.2,2.5, height 1.2
TI-TSSOP-30-DBT0030A [mm]
  rrect25% 1.5x0.3 smd mask+0.05: 1(-2.9,3.5) 2(-2.9,3) 3(-2.9,2.5) 4(-2.9,2) 5(-2.9,1.5) 6(-2.9,1) 7(-2.9,0.5) 8(-2.9,0) 9(-2.9,-0.5) 10(-2.9,-1) 11(-2.9,-1.5) 12(-2.9,-2) 13(-2.9,-2.5) 14(-2.9,-3) 15(-2.9,-3.5) 16(2.9,-3.5) 17(2.9,-3) 18(2.9,-2.5) 19(2.9,-2) 20(2.9,-1.5) 21(2.9,-1) 22(2.9,-0.5) 23(2.9,0) 24(2.9,0.5) 25(2.9,1) 26(2.9,1.5) 27(2.9,2) 28(2.9,2.5) 29(2.9,3) 30(2.9,3.5)
  silkscreen extent -3.02,-4.19 1.65,4.29, body extent -3.2,-3.9 3.2,3.9, height 1.2
"TO-220 - KCS0003B" [mm]
  rrect6% 1.8x1.8 hole 1.2 mask+0.07: 1(-2.54,0)
  round 1.8 hole 1.2 mask+0.07: 2(0,0) 3(2.54,0)
  silkscreen extent -5.08,-1.68 5.08,2.88, body extent -5.08,-1.68 5.08,2.88, height 19.65
"TPTH - PAD TOP" [mm]
  round 2.3 smd: 1(0,0)
  silkscreen extent -1.52,-1.52 1.52,1.52

## Part data
C1_ADC1 C1_ADC2 C1_ADC3 C1_CTRL C1_DAC C1_DSP1 C1_DSP2 C1_LPF1 C1_LPF2 C1_LPF3 C1_MCU C1_PLL C1_POW C2_ADC1 C2_ADC2 C2_ADC3 C2_CTRL C2_DAC C2_DSP1 C2_DSP2 C2_LPF1 C2_LPF2 C2_LPF3 C2_MCU C2_PLL C2_POW C3_ADC1 C3_ADC2 C3_ADC3 C3_CTRL C3_DAC C3_DSP1 C3_DSP2 C3_MCU C3_PLL C3_POW C4_CTRL C4_DAC C4_DSP1 C4_DSP2 C4_LPF1 C4_LPF2 C4_LPF3 C4_MCU C4_PLL C4_POW C5_ADC1 C5_ADC2 C5_ADC3 C5_CTRL C5_DAC C5_DSP1 C5_DSP2 C5_LPF1 C5_LPF2 C5_LPF3 C5_MCU C5_PLL C5_POW C6_DAC C6_DSP1 C6_DSP2 C6_LPF1 C6_LPF2 C6_LPF3 C6_MCU C6_PLL C6_POW C7_ADC1 C7_ADC2 C7_ADC3 C7_DAC C7_DSP1 C7_DSP2 C7_MCU C7_PLL C8_ADC1 C8_ADC2 C8_ADC3 C8_DSP1 C8_DSP2 C8_LPF1 C8_LPF2 C8_LPF3 C8_MCU C8_PLL C9_ADC1 C9_ADC2 C9_ADC3 C9_DSP1 C9_DSP2 C9_LPF1 C9_LPF2 C9_LPF3 C9_MCU C9_PLL C10_ADC1 C10_ADC2 C10_ADC3 C10_DSP1 C10_DSP2 C10_PLL C11_DSP1 C11_DSP2 C11_PLL C12_DSP1 C12_DSP2 C13_DSP1 C13_DSP2 C14_DSP1 C14_DSP2 C15_DSP1 C15_DSP2 C16_DSP1 C16_DSP2 C17_DSP1 C17_DSP2 C18_DSP1 C18_DSP2: library part CAP-SMD
D1_DSP1 D1_DSP2 D3_POW D4_POW: library part LED-SMD
D1_POW D2_POW: "Diode Rectifier 1A 1kV"
J1 J1_CTRL J3_CTRL J5_CTRL J7_CTRL J9_CTRL: library part MOLEX-2
J2 J2_CTRL J3 J4 J4_CTRL J5 J6 J6_CTRL J7 J8 J8_CTRL J10_CTRL: library part MOLEX-3
J11_CTRL: library part CON1X4
R1_DSP1 R1_DSP2 R1_LPF1 R1_LPF2 R1_LPF3 R1_MCU R1_POW R2_DSP1 R2_DSP2 R2_LPF1 R2_LPF2 R2_LPF3 R2_MCU R2_POW R3_DSP1 R3_DSP2 R3_LPF1 R3_LPF2 R3_LPF3 R3_MCU R3_POW R4_DSP1 R4_DSP2 R4_LPF1 R4_LPF2 R4_LPF3 R4_MCU R4_POW R5_LPF1 R5_LPF2 R5_LPF3 R5_MCU R5_POW R6_LPF1 R6_LPF2 R6_LPF3 R6_MCU R6_POW R7_LPF1 R7_LPF2 R7_LPF3 R8_LPF1 R8_LPF2 R8_LPF3 R9_LPF1 R9_LPF2 R9_LPF3 R10_LPF1 R10_LPF2 R10_LPF3: library part RES-SMD
U1_DSP1 U1_DSP2: "SigmaDSP 28-/56-Bit Audio Processor with Two ADCs and Four DACs"
U1_LPF1 U1_LPF2 U1_LPF3 U2_DAC: "Rail-To-Rail Amplifier 2 Circuit - 8-SOIC"
U1_PLL: "Dual PLL Multi-Clock Generator"
U2_PLL: "3.3V ±50ppm 27MHz SMD3225-4P Oscillators"
U3_PLL: "LVCMOS High-Performance Clock Buffer 6-Output"
MH1 MH2 MH3 MH4: ClassName=MountHole

## Via types
v1: diameter 20, hole 10, Top Layer to Bottom Layer, tented both sides, 345 vias
v2: diameter 23.62, hole 11.81, Top Layer to Bottom Layer, tented both sides, 21 vias

## Nets (pads, with @x,y where several pads share a name; then routed paths per layer and width w, separated by ;. In a path a pad name is that pad's centre, name@x,y a point inside that pad or via, vN(x,y) a via of type N, cw(c..) or ccw(c..) an arc to the next point about the centre after c; other vN are vias at no path point)
+3V3: C1_ADC1.2 C1_ADC2.2 C1_ADC3.2 C1_CTRL.2 C1_DAC.2 C1_DSP1.1 C1_DSP2.1 C1_MCU.2 C1_PLL.2 C2_ADC1.2 C2_ADC2.2 C2_ADC3.2 C2_CTRL.2 C2_DAC.2 C2_DSP1.1 C2_DSP2.1 C2_MCU.2 C2_PLL.2 C2_POW.2 C3_ADC1.2 C3_ADC2.2 C3_ADC3.2 C3_CTRL.2 C3_DSP1.1 C3_DSP2.1 C3_MCU.2 C3_PLL.2 C4_CTRL.2 C4_DSP1.1 C4_DSP2.1 C4_MCU.2 C4_PLL.2 C5_ADC1.2 C5_ADC2.2 C5_ADC3.2 C5_CTRL.2 C5_DSP1.1 C5_DSP2.1 C5_MCU.2 C5_PLL.2 C6_DSP1.1 C6_DSP2.1 C6_MCU.2 C6_PLL.2 C7_MCU.2 C7_PLL.2 C8_PLL.2 C9_PLL.2 C10_PLL.2 C11_PLL.2 C16_DSP1.1 C16_DSP2.1 D1_POW.1 J1_CTRL.1 J3_CTRL.1 J5_CTRL.1 J7_CTRL.1 J9_CTRL.1 Q1_DSP1.E Q1_DSP2.E R1_DSP1.2 R1_DSP2.2 R1_MCU.2 R1_POW.2 R2_DSP1.1 R2_DSP2.1 R2_MCU.2 R3_MCU.2 R4_MCU.2 R5_MCU.2 R5_POW.1 R6_MCU.2 TP2_POW.1 U1_ADC1.8 U1_ADC1.13 U1_ADC1.14 U1_ADC2.8 U1_ADC2.13 U1_ADC2.14 U1_ADC3.8 U1_ADC3.13 U1_ADC3.14 U1_DAC.9 U1_DSP1.18 U1_DSP1.34 U1_DSP1.36 U1_DSP1.48 U1_DSP2.7 U1_DSP2.18 U1_DSP2.34 U1_DSP2.36 U1_DSP2.48 U1_MCU.13 U1_MCU.19 U1_MCU.32 U1_MCU.48 U1_MCU.64 U1_PLL.1 U1_PLL.8 U1_PLL.13 U1_PLL.20 U1_POW.2 U2_PLL.1 U2_PLL.4 U3_PLL.5 U3_PLL.8 U3_PLL.12 | length 493.1
  Top Layer w6: U1_ADC3.8@760.83,325 v1(835,325) ; U1_ADC2.8@760.83,835 v1(835,835) ; U1_ADC1.8@760.83,1350 v1(835,1350) ; v1(1430,564.69) U1_DSP2.7@1482.52,564.69
  Top Layer w15: R1_DSP1.2@2015,1130 2015,1131.97 2068.05,1185.02 2069.43,1185.02 2085.55,1201.14 Q1_DSP1.E@2085.55,1209.02 ; R1_DSP2.2@2039.84,99.53 2039.84,101.5 2092.89,154.55 2094.27,154.55 2110.39,170.67 Q1_DSP2.E@2110.39,178.54
  other v1: 2084.84,79.53 2109.84,119.53 660,145 700,145 650,285.63 710,285.63 1594.84,309.53 1594.84,349.53 660,655 700,655 2024.84,669.53 2064.84,669.53 1499.84,729.53 1499.84,774.53 650,795.63 710,795.63 2320,1013.82 2370,1013.82 2060,1110 2085,1150 660,1170 700,1170 650,1310.63 710,1310.63 1570,1340 1570,1380 2000,1700 2040,1700 1475,1760 1215,1775 1255,1775 1475,1805 750,1855 912.5,1855 440,1860 630,1860 750,1895 912.5,1895 440,1900 630,1900 575,2250 750,2255 1000,2255 575,2290 750,2295 1000,2295 895.94,2555 895.47,2595 1132.95,2655 1132.95,2695 605,2770 645,2770 505,2905 545,2906.1 1205,3122.64 1245,3122.64 680,3185 680,3215 915.16,3255 993.9,3255 915.16,3295 993.9,3295